# Altium PCB tsal.PcbDoc
Units mm, origin at the board's own origin, x right, y up, seen from the top; angles counter-clockwise.
Board outline 81.9 x 25 mm, 2 copper layers (Top Layer, Bottom Layer), stack 1.57 mm thick; 58 components, 44 nets, 204 pads, 29 vias.
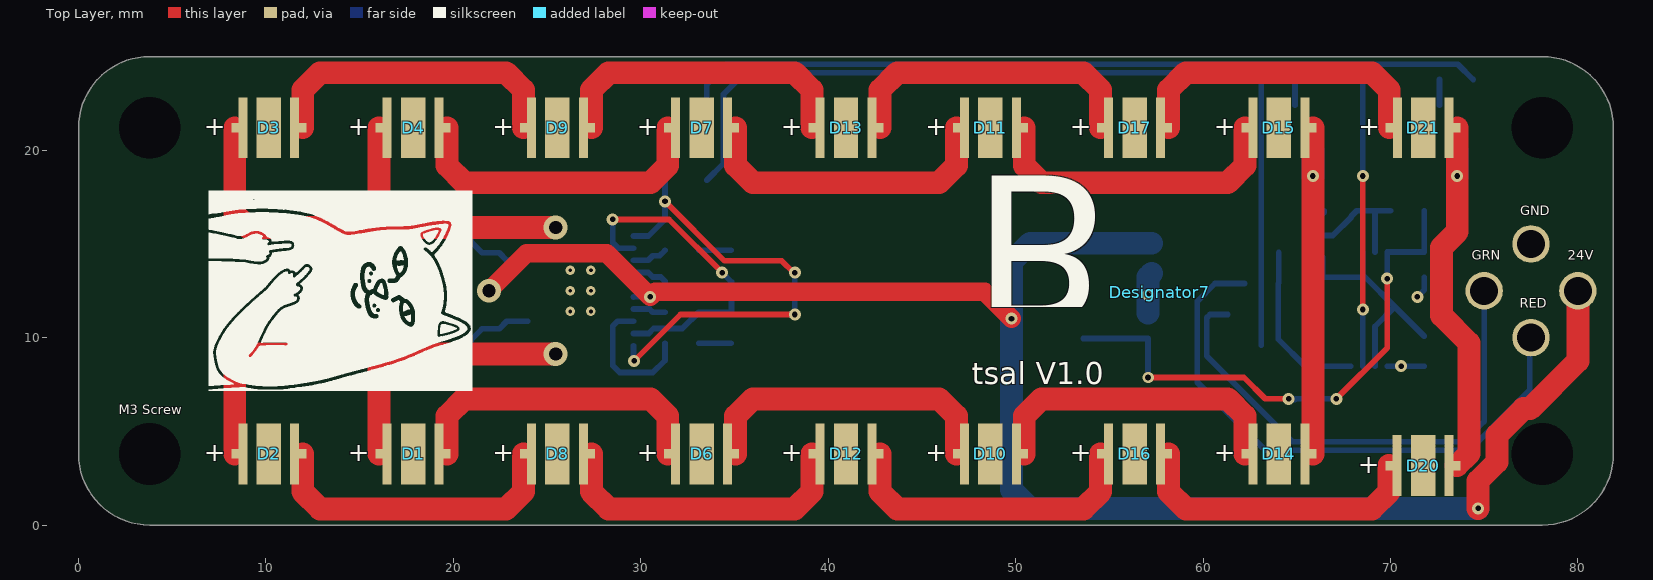
[diagram p0: Top Layer view]
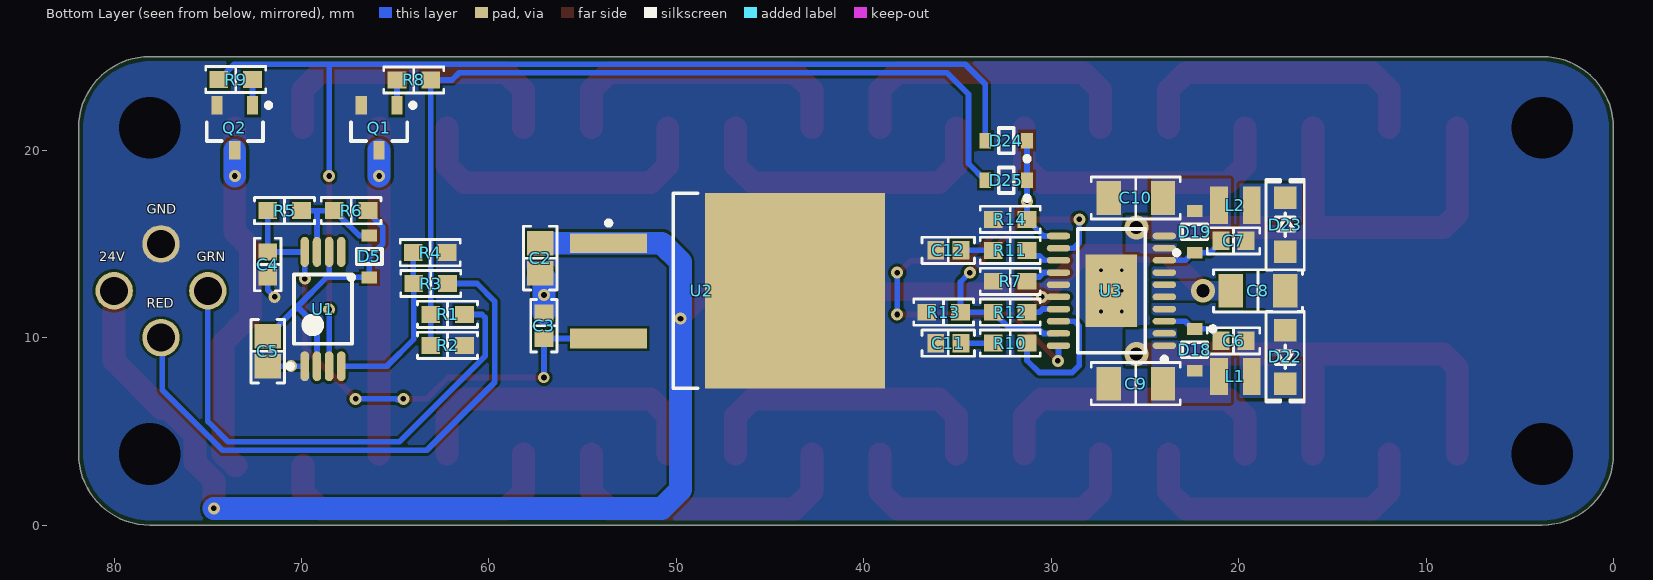
[diagram p1: Bottom Layer view, seen from below]
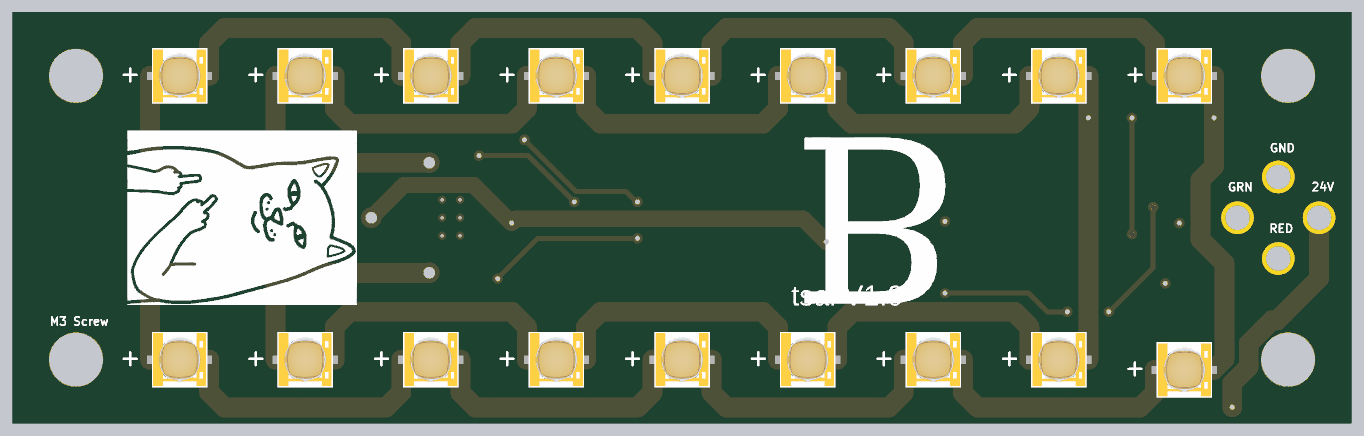
[diagram p2: 3D render of the assembled board from above, using the file's embedded part models]
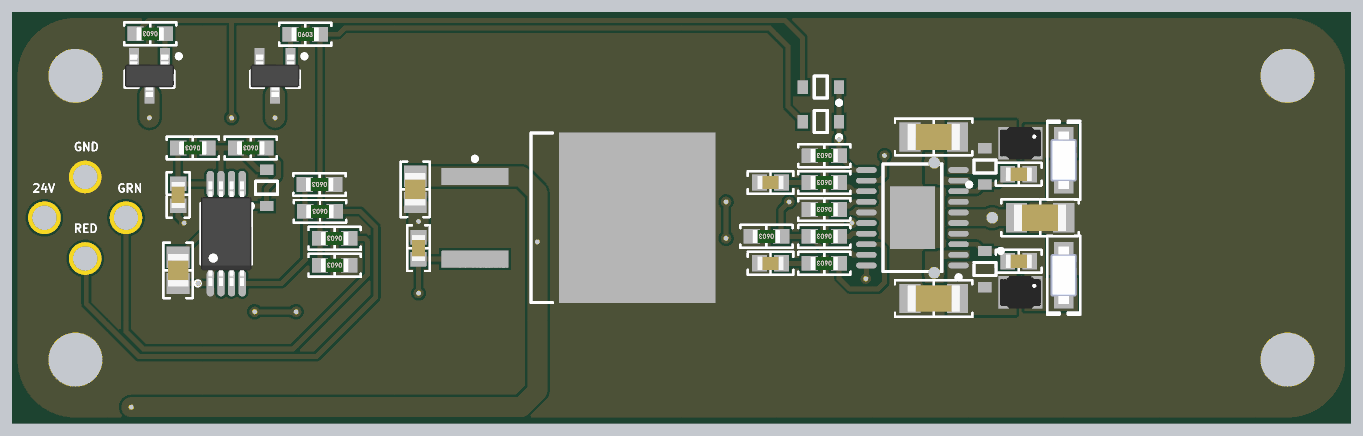
[diagram p3: 3D render of the assembled board from below, using the file's embedded part models]

## Layer stack, top to bottom
Top Solder: solder mask 0.015, Solder Resist, Dk 3.5
Top Layer: signal copper 0.035
Dielectric 1: dielectric 1.5, FR-4, Dk 4.8
Bottom Layer: signal copper 0.035
Bottom Solder: solder mask 0.015, Solder Resist, Dk 3.5

## Board outline
0,3.8 0,21.2 cw(c3.8,21.2) 3.8,25 78.1,25 cw(c78.1,21.2) 81.9,21.2 81.9,3.8 cw(c78.1,3.8) 78.1,0 3.8,0 cw(c3.8,3.8)

## Design rules (kind name [scope] priority, off if disabled: settings)
AcuteAngle [All] p1: minimum=4.50000000000000E+0001 checktracksonly=FALSE
BoardOutlineClearance [All] p1: gap=0.254 ignorepadtopadclearanceinfootprint=FALSE
Clearance [All] p1: gap=0.152 ignorepadtopadclearanceinfootprint=FALSE
ComponentClearance [All] p1: gap=0.1 collisioncheckmode=3 verticalgap=0.254 showdistances=FALSE
FanoutControl Fanout_Small [All] p1 off: bgadir=Out bgaviamode=Centered fanoutstyle=Auto fanoutdirection=Alternating viagrid=0.025 // Protel DXP Scope 1 Expression Was: (CompPinCount < 5)   Fanout_Small (Default Rule)
FanoutControl Fanout_Default [All] p2: bgadir=Out bgaviamode=Centered fanoutstyle=Auto fanoutdirection=Alternating viagrid=0.025 // Fanout_Default (Default Rule)
FanoutControl Fanout_SOIC [All] p3 off: bgadir=Out bgaviamode=Centered fanoutstyle=Auto fanoutdirection=Alternating viagrid=0.025 // Protel DXP Scope 1 Expression Was: IsSOIC   Fanout_SOIC (Default Rule)
FanoutControl Fanout_BGA [All] p4 off: bgadir=Out bgaviamode=Centered fanoutstyle=Auto fanoutdirection=Alternating viagrid=0.025 // Protel DXP Scope 1 Expression Was: IsBGA   Fanout_BGA (Default Rule)
FanoutControl Fanout_LCC [All] p5 off: bgadir=Out bgaviamode=Centered fanoutstyle=Auto fanoutdirection=Alternating viagrid=0.025 // Protel DXP Scope 1 Expression Was: IsLCC   Fanout_LCC (Default Rule)
HoleSize [All] p1: absolutevalues=TRUE maxlimit=7 minlimit=0.2 maxpercent=80.000 minpercent=20.000
MinimumAnnularRing [All] p1: minimumring=0.17
PolygonConnect [All] p1: connectstyle=Direct reliefconductorwidth=0.254 reliefentries=4 polygonreliefangle="90 Angle" airgapwidth=0.254
RoutingVias [All] p1: holewidth=0.3 width=0.64 viastyle="Through Hole" minholewidth=0.3 minwidth=0.61 maxholewidth=0.711 maxwidth=1.27
SMDEntry [All] p1 off: side=TRUE corner=TRUE anyangle=FALSE // Protel DXP Scope 1 Expression Was: not IsRoundPad
SMDToCorner [All] p1: distance=60000
SilkToSolderMaskClearance [All] p1 off: minsilkscreentomaskgap=0.254 clearancetoexposedcopper=TRUE // Protel DXP Scope 1 Expression Was: IsPad
SolderMaskExpansion SolderMaskExpansion_1 [IsVia] p1: expansion=0 istentingtop=TRUE
SolderMaskExpansion [All] p2: expansion=0 istentingtop=FALSE
Width [All] p1: maxlimit=1.219 minlimit=0.152 preferedwidth=0.305
22 further rules are at their usual default settings.

## Components (designator, comment, footprint, x,y, rotation, side; value= is the part's Value field where it differs from the comment)
C2 "SMD Capacitor" "CAP 0805/2012" 57.266,14.24 r90 bottom value=1u
C3 "SMD Capacitor" "CAP 0603/1608" 57.066,10.635 r270 bottom value=100n
C4 "SMD Capacitor" "CAP 0603/1608" 71.804,13.901 r90 bottom value=100n
C5 "SMD Capacitor" "CAP 0805/2012" 71.804,9.276 r270 bottom value=1u
C6 "SMD Capacitor" "CAP 0603/1608" 20.272,9.833 r0 bottom value=220n
C7 "SMD Capacitor" "CAP 0603/1608" 20.272,15.167 r0 bottom value=220n
C8 "SMD Capacitor" "CAP 1206/3216" 18.968,12.5 r0 bottom value=4u7
C9 "SMD Capacitor" "CAP 1206/3216" 25.485,7.547 r180 bottom value=2u2
C10 "SMD Capacitor" "CAP 1206/3216" 25.485,17.453 r180 bottom value=2u2
C11 "SMD Capacitor" "CAP 0603/1608" 35.49,9.707 r180 bottom value=100n
C12 "SMD Capacitor" "CAP 0603/1608" 35.49,14.658 r180 bottom value=100n
D1 "Green, 3.4V" WL-SMDC_3535 17.85,3.8 r180 top
D2 "Red, 2.2V" WL-SMDC_3535 10.15,3.8 r180 top
D3 "Red, 2.2V" WL-SMDC_3535 10.15,21.2 r180 top
D4 "Green, 3.4V" WL-SMDC_3535 17.85,21.2 r180 top
D5 "BAS16HT1G" ONSC-SOD-323-2-477-02_V 66.381,14.333 r90 bottom
D6 "Green, 3.4V" WL-SMDC_3535 33.25,3.8 r180 top
D7 "Green, 3.4V" WL-SMDC_3535 33.25,21.2 r180 top
D8 "Red, 2.2V" WL-SMDC_3535 25.55,3.8 r180 top
D9 "Red, 2.2V" WL-SMDC_3535 25.55,21.2 r180 top
D10 "Green, 3.4V" WL-SMDC_3535 48.65,3.8 r180 top
D11 "Green, 3.4V" WL-SMDC_3535 48.65,21.2 r180 top
D12 "Red, 2.2V" WL-SMDC_3535 40.95,3.8 r180 top
D13 "Red, 2.2V" WL-SMDC_3535 40.95,21.2 r180 top
D14 "Green, 3.4V" WL-SMDC_3535 64.05,3.8 r180 top
D15 "Green, 3.4V" WL-SMDC_3535 64.05,21.2 r180 top
D16 "Red, 2.2V" WL-SMDC_3535 56.35,3.8 r180 top
D17 "Red, 2.2V" WL-SMDC_3535 56.35,21.2 r180 top
D18 "BAS16HT1G" ONSC-SOD-323-2-477-02_V 22.344,9.353 r270 bottom
D19 "BAS16HT1G" ONSC-SOD-323-2-477-02_V 22.344,15.647 r90 bottom
D20 "Red, 2.2V" WL-SMDC_3535 71.743,3.175 r180 top
D21 "Red, 2.2V" WL-SMDC_3535 71.75,21.2 r180 top
D22 "TODO" SOD123F 17.518,8.977 r270 bottom
D23 "TODO" SOD123F 17.518,16.023 r90 bottom
D24 "BAS16HT1G" ONSC-SOD-323-2-477-02_V 32.404,20.514 r0 bottom
D25 "BAS16HT1G" ONSC-SOD-323-2-477-02_V 32.404,18.399 r0 bottom
Designator7 "Comment" LOGO_BALTIC_20mm 57.68,12.435 r0 top
L1 "10 uH, 0.8 A" WE-LQSH_2512 20.171,7.928 r0 bottom
L2 "10 uH, 0.8 A" WE-LQSH_2512 20.171,17.072 r0 bottom
Q1 "IRLML0100TR" SOT23 65.863,21.2 r270 bottom
Q2 "IRLML0100TR" SOT23 73.563,21.2 r270 bottom
R1 "SMD Resistor" "STACKPOLE CSR0603" 62.212,11.239 r0 bottom value=18k
R2 "SMD Resistor" "STACKPOLE CSR0603" 62.212,9.589 r0 bottom value=4k7
R3 "SMD Resistor" "STACKPOLE CSR0603" 63.108,12.889 r0 bottom value=18k
R4 "SMD Resistor" "STACKPOLE CSR0603" 63.134,14.539 r0 bottom value=4k7
R5 "SMD Resistor" "STACKPOLE CSR0603" 70.904,16.776 r0 bottom value=47k
R6 "SMD Resistor" "STACKPOLE CSR0603" 67.353,16.776 r0 bottom value=390k
R7 "SMD Resistor" "STACKPOLE CSR0603" 32.189,13.008 r0 bottom value=22k
R8 "SMD Resistor" "STACKPOLE CSR0603" 64.013,23.749 r180 bottom value=22
R9 "SMD Resistor" "STACKPOLE CSR0603" 73.513,23.775 r0 bottom value=22
R10 "SMD Resistor" "STACKPOLE CSR0603" 32.189,9.707 r0 bottom value=0
R11 "SMD Resistor" "STACKPOLE CSR0603" 32.189,14.658 r0 bottom value=0
R12 "SMD Resistor" "STACKPOLE CSR0603" 32.189,11.358 r0 bottom value=39k
R13 "SMD Resistor" "STACKPOLE CSR0603" 35.74,11.358 r0 bottom value=10k
R14 "SMD Resistor" "STACKPOLE CSR0603" 32.189,16.309 r0 bottom value=10k
U1 "NE555PWR" 8-TSSOP 68.853,11.526 r90 bottom
U2 "L7805ABD2T-TR" TO-263_M 47.266,12.5 r180 bottom
U3 "LT3475IFE-1#PBF" LT-FE-20-EPV-CB_L 26.789,12.5 r0 bottom

## Footprints (in the part's own frame and the unit in brackets; to place one, negate y for a bottom-side part, rotate by r counter-clockwise, add the part's x,y. Pads: shape width x height; smd on the part's side, far side on the other; paste and mask are expansions set on the pad)
8-TSSOP [mm] "TSOP, 8-Leads, Body 3,00x4,40mm, Pitch 0,65mm, IPC Low Density"
  oval 1.6x0.45 smd: 1(-3.05,0.975) 2(-3.05,0.325) 3(-3.05,-0.325) 4(-3.05,-0.975) 5(3.05,-0.975) 6(3.05,-0.325) 7(3.05,0.325) 8(3.05,0.975)
  silkscreen extent -3.17,-1.55 1.85,1.88, body extent -3.2,-1.55 3.2,1.55, height 1.2
"CAP 0603/1608" [mm] "Chip Capacitor, 2-Leads, Body 1.60x0.80mm, IPC Medium Density"
  rect 0.9x1 smd: 1(-0.675,0) 2(0.675,0)
  silkscreen extent -1.4,-0.7 1.4,0.7, body extent -0.8,-0.41 0.8,0.41, height 0.82
"CAP 0805/2012" [mm] "Chip Capacitor, 2-Leads, Body 2.00x1.20mm, IPC Medium Density"
  rect 1.3x1.4 smd: 1(-0.8,0) 2(0.8,0)
  silkscreen extent -1.7,-0.9 1.7,0.9, body extent -1,-0.64 1,0.64, height 1.26
"CAP 1206/3216" [mm] "Chip Capacitor, 2-Leads, Body 3.25x1.60mm, IPC Medium Density"
  rect 1.3x1.8 smd: 1(-1.45,0) 2(1.45,0)
  silkscreen extent -2.37,-1.12 2.37,1.12, body extent -1.6,-0.81 1.6,0.81, height 1.62
LOGO_BALTIC_20mm [mm]
LT-FE-20-EPV-CB_L [mm] "SOP, 20-Leads, Body 6.6x4.5mm, Pitch 0.65mm, Thermal Pad 3.86x2.74mm, IPC High Density"
  oval 1.25x0.35 smd: 1(-2.825,2.925) 2(-2.825,2.275) 3(-2.825,1.625) 4(-2.825,0.975) 5(-2.825,0.325) 6(-2.825,-0.325) 7(-2.825,-0.975) 8(-2.825,-1.625) 9(-2.825,-2.275) 10(-2.825,-2.925) 11(2.825,-2.925) 12(2.825,-2.275) 13(2.825,-1.625) 14(2.825,-0.975) 15(2.825,-0.325) 16(2.825,0.325) 17(2.825,0.975) 18(2.825,1.625) 19(2.825,2.275) 20(2.825,2.925)
  rect 2.74x3.86 smd: 21(0,0)
  silkscreen extent -2.95,-3.3 1.8,3.77, body extent -2.25,-3.3 2.25,3.3, height 1.2
ONSC-SOD-323-2-477-02_V [mm] "SOD, 2-Leads, Body 1.7x1.25mm"
  rect 0.63x0.83 smd: 1(-1.115,0) 2(1.115,0)
  silkscreen extent -1.24,-0.67 0.4,1.09, body extent -0.85,-0.63 0.85,0.63, height 1.06
SOD123F [mm] "SODFL, 2-Leads, Body 1.60x3.50mm, IPC Medium Density"
  rect 1.2x1.2 smd: 1(-1.43,0) 2(1.43,0)
  silkscreen extent -2.41,-1.02 2.41,1.02, body extent -1.75,-0.8 1.75,0.8, height 1.1
SOT23 [mm] "SOT23, 3-Leads, Body 2,90x2,45mm, Pitch 0,95mm, IPC Medium Density"
  rect 1x0.6 smd: 1(-1.2,0.95) 2(-1.2,-0.95) 3(1.2,0)
  silkscreen extent -1.32,-1.5 0.7,1.92, body extent -1.3,-1.5 1.3,1.5, height 1.1
"STACKPOLE CSR0603" [mm] "Chip Resistor, 2-Leads, Body 1.60x0.80mm, IPC Medium Density"
  rect 1x0.9 smd: 1(-0.9,0) 2(0.9,0)
  silkscreen extent -1.6,-0.7 1.6,0.7, body extent -0.85,-0.4 0.85,0.4, height 0.45
TO-263_M [mm] "D2-PAK, 4-Leads, Body 9.2x10.2mm, Pitch 2.54mm, Lead Span 15.4mm, IPC Low Density"
  rect 4.1x1.05 smd: 1(-6.35,2.54) 3(-6.35,-2.54)
  rect 9.6x10.45 smd: 4(3.6,0)
  silkscreen extent -6.48,-5.2 -1.6,5.2, body extent -2.9,-5.2 6.45,5.2, height 4.6
WE-LQSH_2512 [mm] "SMT Semi-Shielded High Saturation Power Inductor, body 2.5x2mm"
  rect 0.95x2 smd: 1(-0.875,0) 2(0.875,0)
  body extent -1.25,-1 1.25,1, height 1.19
WL-SMDC_3535 [mm] "SMD Mono-color Ceramic LED Waterclear, body 3.4x3.4mm, 2-leads"
  rect 0.375x0.5 smd: 1(-1.813,0) 2(1.813,0)
  rect 0.48x3.25 smd: 1(-1.385,0) 2(1.385,0)
  rect 1.3x3.25 smd: "Thermal Pad"(0,0)
  body extent -1.7,-1.7 1.7,1.7, height 2.1

## Part data
C2 C6 C7 C8 C9 C10 C11 C12: "Capacitor with multiple Footprints", Voltage=25V
C3 C4 C5: "Capacitor with multiple Footprints", Voltage=6.3V
D1 D4 D6 D7 D10 D11 D14 D15: library part 150353GS74500, "WL-SMDC SMT Mono-color Ceramic LED Waterclear, size 3535, 3.4V, Green", Emitting Color=Green, Forward Voltage=3.4V, Manufacturer="Wurth Elektronik", Operating Temperature="-40 to +125degC", Chip Technology=InGaN, ComponentLink1Description=Manufacturer, ComponentLink1URL=http://www.we-online.de, ComponentLink2Description=Datasheet, ComponentLink2URL=https://katalog.we-online.de/led/datasheet/150353GS74500.pdf, Manufacturer Part Number=150353GS74500, Mounting Technology=SMT, Packaging="Tape and Reel", Peak Wavelength=520nm, Published Date="October 2019", Size=3535, Viewing Angle=125deg
D2 D3 D8 D9 D12 D13 D16 D17 D20 D21: library part 150353RS74500, "WL-SMDC SMT Mono-color Ceramic LED Waterclear, size 3535, 2.2V, Red", Emitting Color=Red, Forward Voltage=2.2V, Manufacturer="Wurth Elektronik", Operating Temperature="-40 to +125degC", Chip Technology=AlInGaP, ComponentLink1Description=Manufacturer, ComponentLink1URL=http://www.we-online.de, ComponentLink2Description=Datasheet, ComponentLink2URL=https://katalog.we-online.de/led/datasheet/150353RS74500.pdf, Manufacturer Part Number=150353RS74500, Mounting Technology=SMT, Packaging="Tape and Reel", Peak Wavelength=635nm, Published Date="October 2019", Size=3535, Viewing Angle=125deg
D5 D18 D19 D24 D25: library part CMP-1054-00068-1, "Switching Diode, 2-Pin SOD-323, Pb-Free, Tape and Reel", Manufacturer="On Semiconductor", ComponentLink1Description="Manufacturer URL", ComponentLink1URL=http://www.onsemi.com/, ComponentLink2Description=Datasheet, ComponentLink2URL=http://www.onsemi.com/pub_link/Collateral/BAS16HT1-D.PDF, ComponentLink3Description="Package Specification", ComponentLink3URL=http://www.onsemi.com/pub_link/Collateral/477-02.PDF.1, Configuration=Single, DatasheetVersion="Rev. 11", IF Max (A)=0.2, Mounting Technology="Surface Mount", PackageDescription="2-Pin SOD, Body 1.7 x 1.25 mm", PackageReference=SOD-323-2-477-02, PackageVersion="Rev. H, 03/2007", Packing="Tape and Reel", PartNumber=BAS16HT1G, RoHS=TRUE, trr Max (ns)=6
D22 D23: library part "SMD Diode"
L1 L2: library part 74405024100, "SMT Semi-Shielded High Saturation Power Inductor WE-LQSH, size 2512, 10 uH, 0.8 A", DC Resistance max.="522 mOhm", Inductance="10 uH", Operating Temperature="-40 to +125 degC", Peak Voltage max.="25 V", Rated Current="0.8 A", Saturation Current="1.2 A", Self Resonant Frequency="20 MHz", ComponentLink1Description=Manufacturer, ComponentLink1URL=http://www.we-online.de, ComponentLink2Description=Datasheet, ComponentLink2URL=https://katalog.we-online.de/pbs/datasheet/74405024100.pdf, Mounting Technology=SMT, Packaging="Tape and Reel", Part Number=74405024100, Published Date="November 2018", Publisher="Wurth Elektronik", Size=2512
Q1 Q2: library part "MOSFET N", "N-Channel MOSFET"
R1 R2 R3 R4 R5 R6 R7 R8 R9 R10 R11 R12 R13 R14: "Resistor with multiple footprints"
U1: library part NE555
U2: library part CMP-0244-00199-1, "Positive Voltage Regulator, 3-Pin D2PAK, Tape and Reel", ComponentLink1Description="Manufacturer URL", ComponentLink1URL=http://www.st.com, ComponentLink2Description=Datasheet, ComponentLink2URL=http://www.st.com/internet/com/TECHNICAL_RESOURCES/TECHNICAL_LITERATURE/DATASHEET/CD00000444.pdf, DatasheetVersion=16/11/2011, PackageDescription="3-Pin Transistor Outline Package 2.54 mm Pitch, 15.4 mm Lead Span (D2PAK)", PackageReference=TO-263, PackageVersion=2011
U3: library part CMP-0477-00152-1, "Dual Step-Down 1.5 A LED Driver, 4 to 36 V Vin, 25 V Vout MAX, 20-pin SOP (FE-20-EPV-CB), -40 to 125 degC, Pb-Free", Manufacturer="Linear Technology", ComponentLink1Description="Manufacturer URL", ComponentLink1URL=http://www.linear.com/, ComponentLink2Description=Datasheet, ComponentLink2URL=http://cds.linear.com/docs/en/datasheet/3475fb.pdf, ComponentLink3Description="Package Specification", ComponentLink3URL=http://cds.linear.com/docs/en/packaging/05081663__J_FE20(CB).pdf, DatasheetVersion="Rev. B", Mounting Technology="Surface Mount", PackageDescription="20-Pin Plastic TSSOP, Body 6.5 x 4.4 mm, Pitch 0.65 mm", PackageReference=FE-20, PackageVersion="Rev. I, 05/2011", PartNumber=LT3475IFE-1#PBF, RoHS=TRUE, Topology="Buck, LED Driver", Vin Min(V)=4

## Free pads (board coordinates)
  round 2 hole 1.5: 2(75,12.5) 2(77.5,10) 2(77.5,15) 2(80,12.5)
  round 0 hole 3.3: ""(3.8,3.8) ""(3.8,21.2) ""(78.1,3.8) ""(78.1,21.2)

## Via types
v1: diameter 0.64, hole 0.3, Top Layer to Bottom Layer, tented both sides, 19 vias
v2: diameter 0.5, hole 0.2, Top Layer to Bottom Layer, tented both sides, 6 vias
v3: diameter 1.27, hole 0.711, Top Layer to Bottom Layer, tented both sides, 3 vias
v4: diameter 0.61, hole 0.3, Top Layer to Bottom Layer, tented both sides, 1 vias

## Nets (pads, with @x,y where several pads share a name; then routed paths per layer and width w, separated by ;. In a path a pad name is that pad's centre, name@x,y a point inside that pad or via, vN(x,y) a via of type N, cw(c..) or ccw(c..) an arc to the next point about the centre after c; other vN are vias at no path point)
+5V: C3.2 C4.2 R5.2 U1.8 U2.3 | length 29.2
  Top Layer w0.305: v4(57.066,7.874) 62.179,7.874 63.316,6.736 v1(64.571,6.736) ; v1(67.111,6.736) 69.828,9.454 v1(69.828,13.151)
  Bottom Layer w0.305: U2.3 C3.2 v4(57.066,7.874) ; v1(64.571,6.736) 64.609,6.698 64.913,6.698 64.951,6.736 v1(67.111,6.736) ; v1(69.828,13.151) U1.8 C4.2 R5.2
+24V: C2.2 C8.2 pad.2@80,12.5 U2.1 U3.5 U3.6 U3.16 | length 90.6
  Top Layer w1: v3(21.899,12.5) 23.901,14.502 28.183,14.502 v1(30.502,12.183) 30.765,12.446 48.357,12.446 v1(49.784,11.019)
  Top Layer w1.219: v1(74.676,0.889) 74.676,2.356 75.688,3.368 75.688,4.799 77.101,6.212 77.454,6.212 80,8.758 pad.2@80,12.5
  Bottom Layer w0.305: U3.16 29.618,12.179 30.498,12.179 v1(30.502,12.183)
  Bottom Layer w1.219: C2.2 U2.1 50.778,15.04 49.784,14.046 v1(49.784,11.019) 49.784,1.885 50.78,0.889 v1(74.676,0.889)
BOOST1: C6.2 D18.1 U3.3 | length 3.5
  Bottom Layer w0.305: C6.2 20.947,9.883 21.532,10.468 D18.1 22.444,10.468 22.851,10.875 U3.3
BOOST2: C7.2 D19.1 U3.8 | length 3.5
  Bottom Layer w0.305: C7.2 20.947,15.117 21.532,14.532 D19.1 22.444,14.532 22.851,14.125 U3.8
GND: C2.1 C3.1 C4.1 C5.2 C8.1 C9.1 C10.1 C11.1 C12.1 D22.1 D23.1 pad. pad.2@77.5,15 Q1.2 Q2.2 R2.1 R4.1 R7.2 R13.2 R14.2 U1.1 U2.4 U3.15 U3.21 | length 5.4
  Bottom Layer w0.305: U1.1 C5.2 ; v1(71.435,12.174) 71.804,12.543 C4.1
  Bottom Layer w1.219: C3.1 57.066,13.24 C2.1
  other v1: 70.572,8.476 57.066,12.275
  other v2: 26.239,11.4 27.339,11.4 26.239,12.5 27.339,12.5 26.239,13.6 27.339,13.6
GRN_EN: D25.2 R1.2 R2.2 R8.2 | length 48.5
  Bottom Layer w0.305: D25.2 34.417,19.297 34.417,22.987 35.566,24.136 61.589,24.136 61.976,23.749 R8.2 R1.2 R2.2
GRN_IN_TSAC: pad.2@75,12.5 R1.1 | length 27.3
  Bottom Layer w0.305: R1.1 60.377,11.239 60.198,11.06 60.198,9.017 64.77,4.445 73.918,4.445 75,5.528 pad.2@75,12.5
NetC5_1: C5.1 D5.1 R6.1 U1.2 U1.6 | length 15.9
  Bottom Layer w0.305: R6.1 66.453,16.681 65.662,15.889 65.662,15.007 66.381,14.287 D5.1 68.528,13.218 ; U1.6 68.528,13.218 ; U1.2 69.178,10.593 70.233,11.647 ; C5.1 70.233,11.647 ; 68.528,13.218 68.662,13.218 70.233,11.647
NetC11_2: C11.2 R10.2 | length 1.7
  Bottom Layer w0.305: R10.2 C11.2
NetC12_2: C12.2 R11.2 | length 1.7
  Bottom Layer w0.305: R11.2 C12.2
NetD1_1: D1.1 D6.2 | length 16.6
  Top Layer w1.219: D1.1@19.663,3.8 19.663,5.815 20.584,6.736 30.516,6.736 31.438,5.815 D6.2@31.438,3.8
NetD2_1: D2.1 D8.2 | length 16.6
  Top Layer w1.219: D2.1@11.963,3.8 11.963,1.785 12.884,0.864 22.816,0.864 23.738,1.785 D8.2@23.738,3.8
NetD3_1: D3.1 D9.2 | length 16.6
  Top Layer w1.219: D3.1@11.963,21.2 11.963,23.215 12.884,24.136 22.816,24.136 23.738,23.215 D9.2@23.738,21.2
NetD4_1: D4.1 D7.2 | length 16.6
  Top Layer w1.219: D4.1@19.663,21.2 19.663,19.185 20.584,18.264 30.516,18.264 31.438,19.185 D7.2@31.438,21.2
NetD5_2: D5.2 R5.1 R6.2 U1.7 | length 6.4
  Bottom Layer w0.305: D5.2 66.925,15.448 67.906,16.429 67.906,16.479 68.203,16.776 69.178,16.776 ; U1.7 69.178,16.776 ; R5.1 69.178,16.776
NetD6_1: D6.1 D10.2 | length 16.6
  Top Layer w1.219: D6.1@35.063,3.8 35.063,5.815 35.984,6.736 45.916,6.736 46.838,5.815 D10.2@46.838,3.8
NetD7_1: D7.1 D11.2 | length 16.6
  Top Layer w1.219: D7.1@35.063,21.2 35.063,19.185 35.984,18.264 45.916,18.264 46.838,19.185 D11.2@46.838,21.2
NetD8_1: D8.1 D12.2 | length 16.6
  Top Layer w1.219: D8.1@27.363,3.8 27.363,1.785 28.284,0.864 38.216,0.864 39.138,1.785 D12.2@39.138,3.8
NetD9_1: D9.1 D13.2 | length 16.6
  Top Layer w1.219: D9.1@27.363,21.2 27.363,23.215 28.284,24.136 38.216,24.136 39.138,23.215 D13.2@39.138,21.2
NetD10_1: D10.1 D14.2 | length 16.6
  Top Layer w1.219: D10.1@50.463,3.8 50.463,5.815 51.384,6.736 61.316,6.736 62.238,5.815 D14.2@62.238,3.8
NetD11_1: D11.1 D15.2 | length 16.6
  Top Layer w1.219: D11.1@50.463,21.2 50.463,19.185 51.384,18.264 61.316,18.264 62.238,19.185 D15.2@62.238,21.2
NetD12_1: D12.1 D16.2 | length 16.6
  Top Layer w1.219: D12.1@42.763,3.8 42.763,1.785 43.684,0.864 53.616,0.864 54.538,1.785 D16.2@54.538,3.8
NetD13_1: D13.1 D17.2 | length 16.6
  Top Layer w1.219: D13.1@42.763,21.2 42.763,23.215 43.684,24.136 53.616,24.136 54.538,23.215 D17.2@54.538,21.2
NetD14_1: D14.1 D15.1 Q1.3 | length 18.8
  Top Layer w1.219: D14.1@65.863,3.8 v1(65.863,18.625) D15.1@65.863,21.2
  Bottom Layer w1.219: v1(65.863,18.625) Q1.3
NetD16_1: D16.1 D20.2 | length 15.9
  Top Layer w1.219: D16.1@58.163,3.8 58.163,1.785 59.084,0.864 69.016,0.864 69.931,1.778 D20.2@69.931,3.175
NetD17_1: D17.1 D21.2 | length 16.6
  Top Layer w1.219: D17.1@58.163,21.2 58.163,23.215 59.084,24.136 69.016,24.136 69.938,23.215 D21.2@69.938,21.2
NetD20_1: D20.1 D21.1 Q2.3 | length 20.7
  Top Layer w1.219: D20.1@73.498,3.175 73.556,3.175 74.193,3.813 74.193,9.72 72.73,11.183 72.73,14.818 73.563,15.651 v1(73.563,18.625) D21.1@73.563,21.2
  Bottom Layer w1.219: v1(73.563,18.625) Q2.3
NetQ1_1: Q1.1 R8.1 | length 1.3
  Bottom Layer w0.305: Q1.1 R8.1
NetQ2_1: Q2.1 R9.1 | length 1.4
  Bottom Layer w0.305: Q2.1 R9.1
NetR7_1: R7.1 U3.14 | length 1.9
  Bottom Layer w0.305: U3.14 30.395,13.475 30.637,13.233 31.064,13.233 R7.1
OUT1: C9.2 D18.2 L1.2 U3.1
OUT2: C10.2 D19.2 L2.2 U3.10
PWM: D24.1 D25.1 R14.1 U3.11 U3.20 | length 27.4
  Top Layer w0.305: v1(29.646,8.763) 32.122,11.239 v1(38.216,11.239) ; v1(31.289,17.277) 31.292,17.277 34.472,14.097 37.526,14.097 38.151,13.472 v1(38.216,13.472)
  Bottom Layer w0.305: U3.20 29.614,8.795 v1(29.646,8.763) ; U3.11 30.406,15.425 R14.1 v1(31.289,17.277) D24.1 ; v1(38.216,11.239) v1(38.216,13.472)
RED_EN: R3.2 R4.2 U1.4 | length 9.1
  Bottom Layer w0.305: R4.2 64.034,12.915 R3.2 64.008,9.922 65.453,8.476 U1.4
RED_IN_DISTRI: pad.2@77.5,10 R3.1 | length 30.6
  Bottom Layer w0.305: R3.1 60.641,12.889 59.69,11.938 59.69,7.62 63.322,3.988 74.215,3.988 77.437,7.21 77.437,9.937 pad.2@77.5,10
RED_SW: D24.2 R9.2 U1.3 | length 60.8
  Top Layer w0.305: v1(68.528,11.5) v1(68.528,18.625)
  Bottom Layer w0.305: D24.2 33.519,23.527 34.586,24.594 68.528,24.594 ; U1.3 v1(68.528,11.5) ; v1(68.528,18.625) 68.528,24.594 ; R9.2 73.594,24.594 68.528,24.594
REF: R12.1 U3.17 | length 1.7
  Bottom Layer w0.305: U3.17 30.47,11.525 30.637,11.358 R12.1
SW1: C6.1 D22.2 L1.1 U3.4
SW2: C7.1 D23.2 L2.1 U3.7
VADJ: R12.2 R13.1 U3.12 U3.19 | length 17.5
  Top Layer w0.305: v1(28.503,16.309) 31.509,16.309 v1(34.345,13.472)
  Bottom Layer w0.305: v1(28.503,16.309) 28.503,15.067 28.795,14.775 U3.12 ; U3.19 30.426,10.225 30.686,10.485 32.217,10.485 R12.2 R13.1 34.84,12.14 34.84,12.978 v1(34.345,13.472)
VBuck1: D1.2 D2.2 U3.2 | length 27.3
  Top Layer w1.219: D2.2@8.338,3.8 8.338,8.411 9.052,9.125 16.038,9.125 ; D1.2@16.038,3.8 16.038,9.125 ; v3(25.455,9.125) 16.038,9.125
VBuck2: D3.2 D4.2 U3.9 | length 27.3
  Top Layer w1.219: D3.2@8.338,21.2 8.338,16.589 9.052,15.875 16.038,15.875 ; D4.2@16.038,21.2 16.038,15.875 ; v3(25.455,15.875) 16.038,15.875
VC1: R10.1 U3.18 | length 7.5
  Bottom Layer w0.305: U3.18 28.755,10.875 28.503,10.623 28.503,8.509 28.874,8.138 30.642,8.138 31.289,8.785 R10.1
VC2: R11.1 U3.13 | length 1.9
  Bottom Layer w0.305: U3.13 29.623,14.134 30.397,14.134 30.637,14.374 31.005,14.374 R11.1
pads on no net: "D1.Thermal Pad" "D2.Thermal Pad" "D3.Thermal Pad" "D4.Thermal Pad" "D6.Thermal Pad" "D7.Thermal Pad" "D8.Thermal Pad" "D9.Thermal Pad" "D10.Thermal Pad" "D11.Thermal Pad" "D12.Thermal Pad" "D13.Thermal Pad" "D14.Thermal Pad" "D15.Thermal Pad" "D16.Thermal Pad" "D17.Thermal Pad" "D20.Thermal Pad" "D21.Thermal Pad" U1.5

## Polygon pours and split planes (outlines as drawn)
GND on Bottom Layer "GND_L02_P009" (solid, pour order 9): 0,25 0,0 85.725,0 85.725,25
+24V on Bottom Layer "+24V_L02_P000" (solid, pour order 0): 24.63,11.992 24.63,13.008 19.804,13.008 19.804,11.992
SW1 on Bottom Layer "SW1_L02_P002" (solid, pour order 2): 18.661,8.817 16.629,8.817 16.629,6.785 19.931,6.785 19.931,9.198 20.185,9.198 20.185,10.468 24.63,10.468 24.63,11.865 19.804,11.865 19.804,11.4 18.661,11.4
SW2 on Bottom Layer "SW2_L02_P003" (solid, pour order 3): 18.661,16.183 16.629,16.183 16.629,18.215 19.931,18.215 19.931,15.802 20.185,15.802 20.185,14.532 24.63,14.532 24.63,13.135 19.804,13.135 19.804,13.6 18.661,13.6
GND on Bottom Layer "GND_L02_P008" (solid, pour order 8): 16.629,9.575 16.629,15.425 18.28,15.425 18.28,9.575
VBuck2 on Bottom Layer "VBUCK2_L02_P007" (solid, pour order 7): 26.027,14.515 26.027,16.51 24.884,16.51 24.884,15.04 23.298,15.04 23.298,14.515
OUT1 on Bottom Layer "OUT1_L02_P004" (solid, pour order 4): 21.777,9.833 21.777,9.092 20.418,9.092 20.418,6.531 24.63,6.531 24.63,9.833
VBuck1 on Bottom Layer "VBUCK1_L02_P006" (solid, pour order 6): 26.027,10.485 26.027,8.509 24.884,8.509 24.884,9.96 23.298,9.96 23.298,10.485
OUT2 on Bottom Layer "OUT2_L02_P005" (solid, pour order 5): 21.777,15.167 21.777,15.908 20.418,15.908 20.418,18.469 24.63,18.469 24.63,15.167

## Silkscreen, mask and mechanical layers (free items; w line width, h text height)
Top Overlay:
  drawing of 13 lines, arcs and shapes, not listed
  text "GND" at 76.922,16.541 h0.5
  text "GRN" at 74.35,14.146 h0.5
  text "24V" at 79.466,14.159 h0.5
  text "RED" at 76.892,11.6 h0.5
  text "tsal V1.0" at 47.647,7.122 h2
  text "M3 Screw" at 2.132,5.915 h0.5
Bottom Overlay:
  text "GND" at 78.259,16.61 h0.5
  text "GRN" at 75.592,14.07 h0.5
  text "24V" at 80.799,14.07 h0.5
  text "RED" at 78.259,11.6 h0.5
Mechanical 1:
  the board outline again, w0.1
Board Outline:
  the board outline again, w0.2

## Text inside footprints (layer, text, board x,y; h text height)
D1: Top Overlay "+" at 15.55,4.25 h1.02 r180
D2: Top Overlay "+" at 7.85,4.25 h1.02 r180
D3: Top Overlay "+" at 7.85,21.65 h1.02 r180
D4: Top Overlay "+" at 15.55,21.65 h1.02 r180
D6: Top Overlay "+" at 30.95,4.25 h1.02 r180
D7: Top Overlay "+" at 30.95,21.65 h1.02 r180
D8: Top Overlay "+" at 23.25,4.25 h1.02 r180
D9: Top Overlay "+" at 23.25,21.65 h1.02 r180
D10: Top Overlay "+" at 46.35,4.25 h1.02 r180
D11: Top Overlay "+" at 46.35,21.65 h1.02 r180
D12: Top Overlay "+" at 38.65,4.25 h1.02 r180
D13: Top Overlay "+" at 38.65,21.65 h1.02 r180
D14: Top Overlay "+" at 61.75,4.25 h1.02 r180
D15: Top Overlay "+" at 61.75,21.65 h1.02 r180
D16: Top Overlay "+" at 54.05,4.25 h1.02 r180
D17: Top Overlay "+" at 54.05,21.65 h1.02 r180
D20: Top Overlay "+" at 69.443,3.625 h1.02 r180
D21: Top Overlay "+" at 69.45,21.65 h1.02 r180
Designator7: Top Overlay "B" at 47.68,22.435 h20 r180